# Altium PCB pfe-final.PcbDoc
Units mil, origin at the board's own origin, x right, y up, seen from the top; angles counter-clockwise.
Board outline 6945 x 3630 mil, 2 copper layers (Top Layer, Bottom Layer), stack 61.855 mil thick; 24 components, 17 nets, 158 pads, 15 vias.
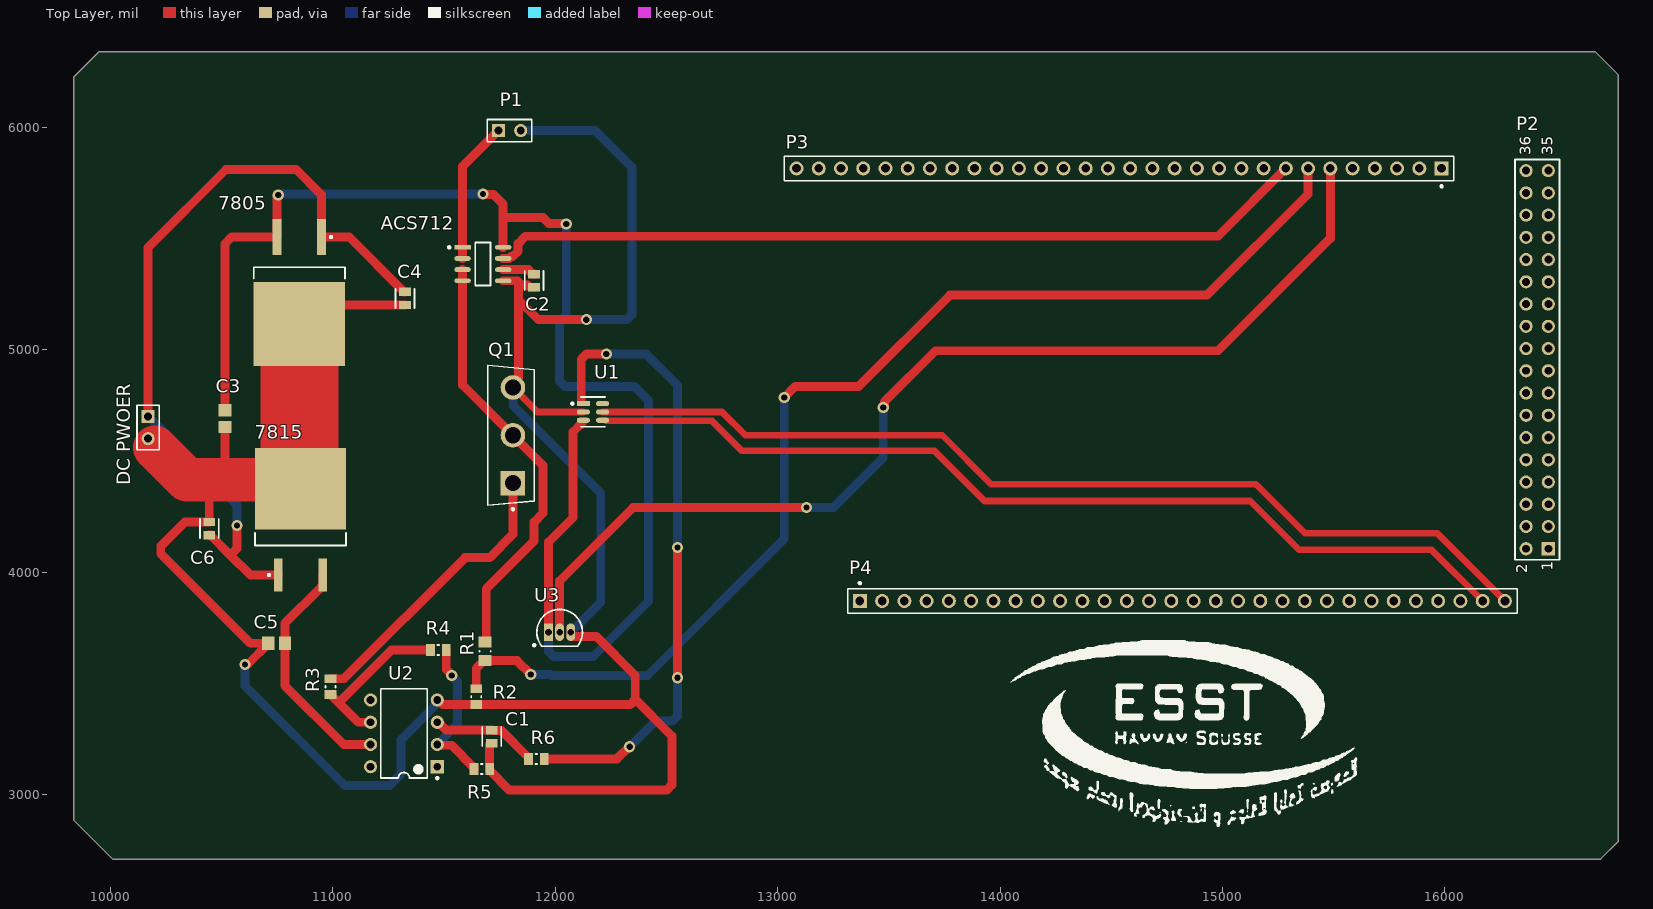
[diagram p0: Top Layer view]
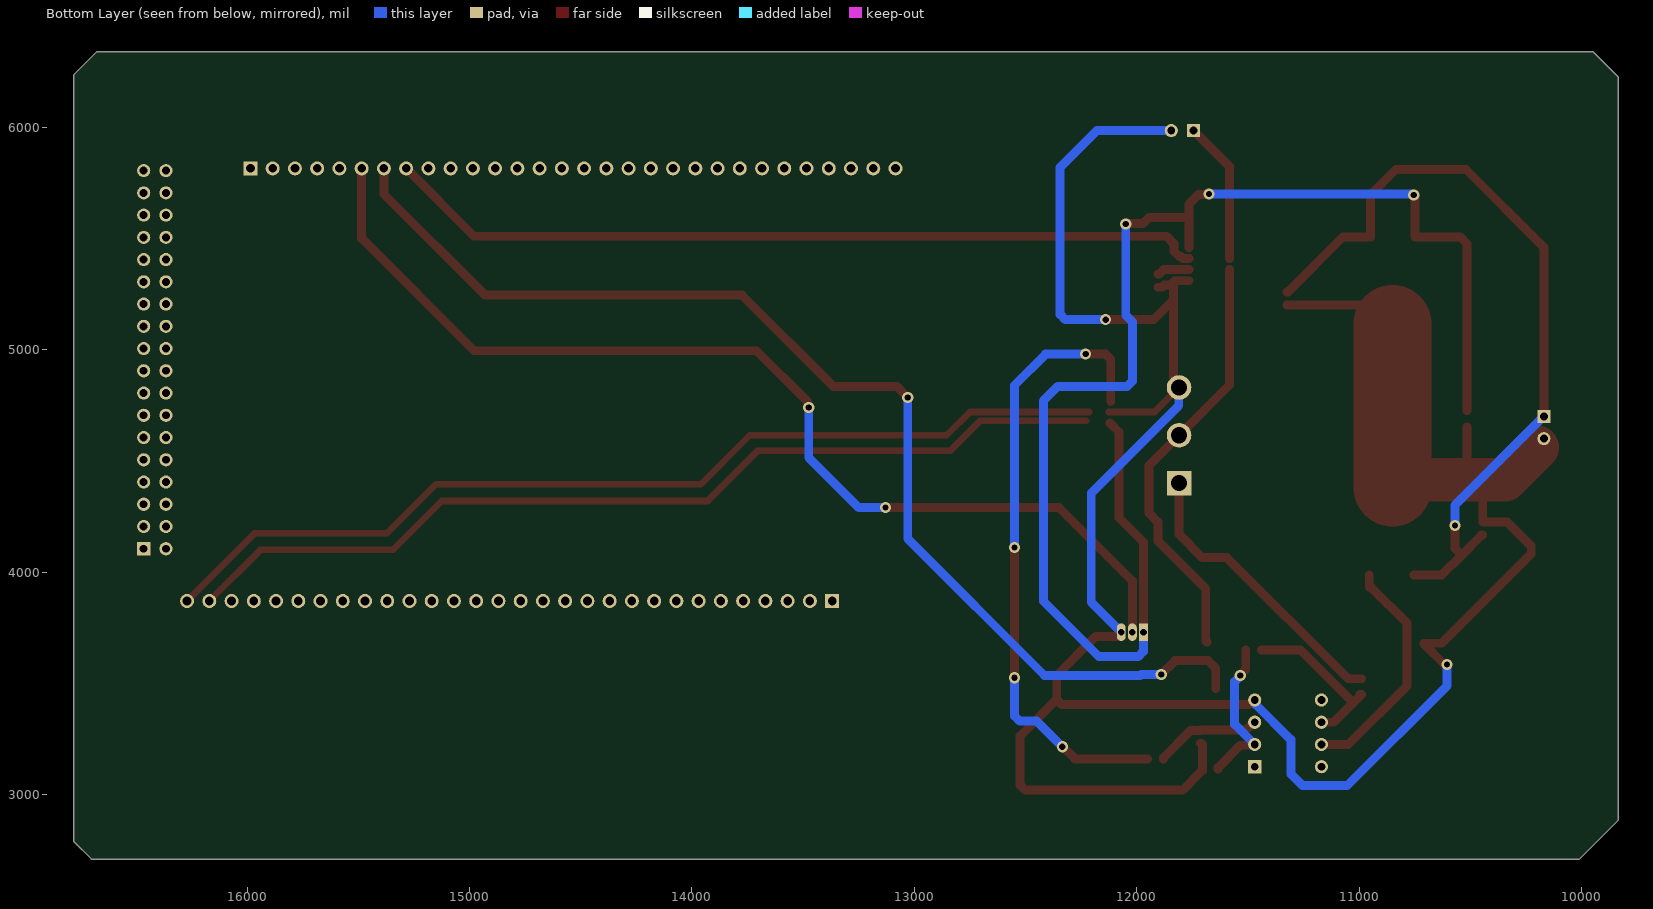
[diagram p1: Bottom Layer view, seen from below]
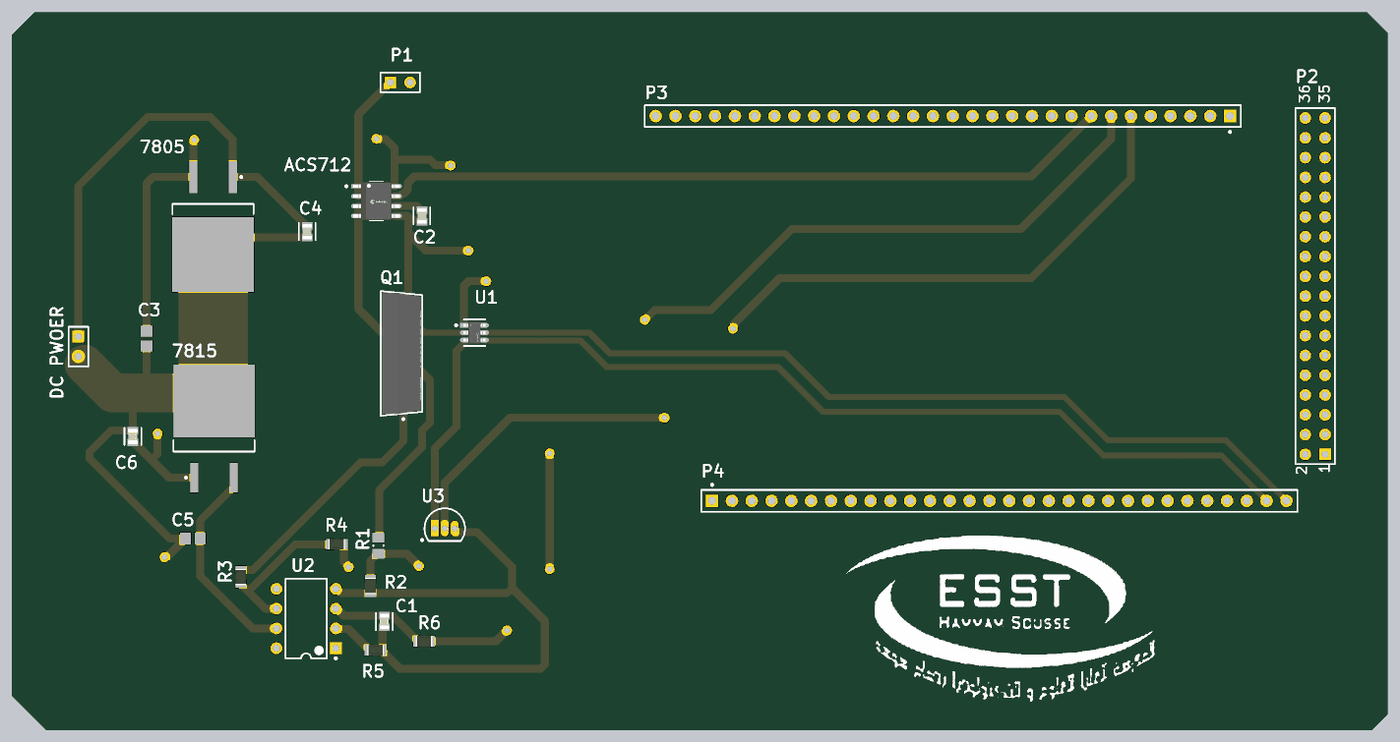
[diagram p2: 3D render of the assembled board from above, using the file's embedded part models]

## Layer stack, top to bottom
Top Solder: solder mask 0.4, Solder Resist, Dk 3.5
Top Layer: signal copper 1.4
Dielectric 1: dielectric 59.0551, FR-4, Dk 4.4
Bottom Layer: signal copper 1.4
Bottom Solder: solder mask 0.4, Solder Resist, Dk 3.5

## Board outline
9835,2885 10010,2710 16700,2710 16780,2790 16780,6235 16675,6340 9950,6340 9835,6225

## Design rules (kind name [scope] priority, off if disabled: settings)
Clearance [All] p1: gap=10 ignorepadtopadclearanceinfootprint=FALSE
MinimumSolderMaskSliver [All] p1: minsoldermaskwidth=1
PolygonConnect [All] p1: connectstyle=Relief reliefconductorwidth=10 reliefentries=4 polygonreliefangle="90 Angle" airgapwidth=10
RoutingVias [All] p1: holewidth=28 width=50 viastyle="Through Hole" minholewidth=28 minwidth=50 maxholewidth=28 maxwidth=50
SilkToSolderMaskClearance [Istext] p1: minsilkscreentomaskgap=10 clearancetoexposedcopper=TRUE
SolderMaskExpansion [All] p1: expansion=4 istentingtop=FALSE
Width [All] p1: maxlimit=1000 minlimit=10 preferedwidth=10
28 further rules are at their usual default settings.

## Components (designator, comment, footprint, x,y, rotation, side; value= is the part's Value field where it differs from the comment)
7805 "L7805CD2T-TR" TO-263_M 10850,5256.73 r270 top
7815 "L7815CD2T-TR" TO-263_N 10855,4235.24 r90 top
ACS712 "ACS712ELCTR-30A-T" FP-LC-8-IPC_C 11675,5385 r0 top
C1 "C0805C106K8PACTU" FP-C0805C-DG-MFG 11715,3260 r270 top value=10uF
C2 "C0805C102J1GACTU" FP-C0805C-DN-MFG 11905,5310 r270 top value=1nF
C3 "GRM21BR71H104KA01L" CAPC2013X135X45ML10T25 10515,4690 r90 top
C4 "C0805C334K5RACTU" FP-C0805C-DN-MFG 11325,5230.47 r270 top value="0.33 μF"
C5 "GRM21BR71H104KA01L" CAPC2013X135X45ML10T25 10747.6,3680 r0 top
C6 "C0805C334K5RACTU" FP-C0805C-DN-MFG 10445,4195.47 r90 top value="0.33 μF"
"DC PWOER" "Header 2" HDR1X2 10170,4700 r270 top
P1 "Header 2" HDR1X2 11745,5985 r0 top
P2 "Header 18X2" HDR2X18 16465,4105 r90 top
P3 "Header 30" HDR1X30 15985,5815 r180 top
P4 "Header 30" HDR1X30 13370,3870 r0 top
Q1 "IRFP260NPBF" FP-PG-TO247-3-MFG 11801.04,4615 r180 top
R1 "150K 1% 0805(2012)" RESC0805(2012)_M 11685,3643.66 r90 top value=90k
R2 "RC0805FR-0710KL" RESC2013X60X35NL10T20 11645,3440 r90 top value=10k
R3 "RC0805FR-0710KL" RESC2013X60X35NL10T20 10990,3485 r90 top value=470
R4 "RC0805FR-0710KL" RESC2013X60X35NL10T20 11475,3650 r180 top value=20k
R5 "RC0805FR-0710KL" RESC2013X60X35NL10T20 11670,3115 r180 top value=10K
R6 "RC0805FR-0710KL" RESC2013X60X35NL10T20 11915.43,3160 r180 top value=10K
U1 "MCP4725A0T-E/CH" FP-C04-028-CHY-IPC_B 12170,4720 r0 top
U2 "TL081CP" P0008A 11320,3275 r180 top
U3 "LM35CZ" Z03A 12020,3730 r270 top

## Footprints (in the part's own frame and the unit in brackets; to place one, negate y for a bottom-side part, rotate by r counter-clockwise, add the part's x,y. Pads: shape width x height; smd on the part's side, far side on the other; paste and mask are expansions set on the pad)
CAPC2013X135X45ML10T25 [mm] "Chip Capacitor, 2-Leads, Body 2.10x1.35mm, IPC Low Density"
  rect 1.4x1.5 smd: 1(-0.95,0) 2(0.95,0)
  body extent -1.05,-0.67 1.05,0.67, height 1.35
FP-C04-028-CHY-IPC_B [mm]
  rect 1.505x0.578 smd paste+0 mask+0: 1(-1.1,0.95)
  rrect100% 1.505x0.578 smd paste+0 mask+0: 2(-1.1,0) 3(-1.1,-0.95) 4(1.1,-0.95) 5(1.1,0) 6(1.1,0.95)
  silkscreen extent -2.48,-1.7 1.4,1.7, body extent -2.1,-1.7 2.1,1.7, height 0.25
FP-C0805C-DG-MFG [mm]
  rect 0.95x1.35 smd paste+0 mask+0: 1(-0.75,0) 2(0.75,0)
  silkscreen extent -1.11,-1.08 1.1,1.07, body extent -1.4,-0.85 1.4,0.85, height 0.25
FP-C0805C-DN-MFG [mm]
  rect 0.95x1.35 smd paste+0 mask+0: 1(-0.75,0) 2(0.75,0)
  silkscreen extent -1.1,-1.07 1.1,1.07, body extent -1.4,-0.85 1.4,0.85, height 0.25
FP-LC-8-IPC_C [mil]
  rect 73.78x21.34 smd paste+0 mask+0: 1(-91.18,75)
  rrect100% 73.78x21.34 smd paste+0 mask+0: 2(-91.18,25) 3(-91.18,-25) 4(-91.18,-75) 5(91.18,-75) 6(91.18,-25) 7(91.18,25) 8(91.18,75)
  silkscreen extent -156,-96 35,96, body extent -132,-100 132,100, height 10
FP-PG-TO247-3-MFG [mm]
  rect 2.8x2.8 hole 1.85 paste-2539.97 mask+0: 1(-0.228,5.46)
  round 2.8 hole 1.85 paste-2539.97 mask+0: 2(-0.228,0) 3(-0.228,-5.46)
  silkscreen extent -2.66,-8 2.66,8.56, body extent -2.76,-8.16 2.76,8.16, height 0.25
HDR1X2 [mm] "Connector; Header; 2 Position"
  rect 1.5x1.5 hole 0.9: 1(0,0)
  round 1.5 hole 0.9: 2(2.54,0)
  silkscreen extent -1.27,-1.27 3.81,1.27
HDR1X30 [mm] "Connector; Header; 30 Position"
  rect 1.6x1.6 hole 0.99: 1(0,0)
  round 1.6 hole 0.99: 2(2.54,0) 3(5.08,0) 4(7.62,0) 5(10.16,0) 6(12.7,0) 7(15.24,0) 8(17.78,0) 9(20.32,0) 10(22.86,0) 11(25.4,0) 12(27.94,0) 13(30.48,0) 14(33.02,0) 15(35.56,0) 16(38.1,0) 17(40.64,0) 18(43.18,0) 19(45.72,0) 20(48.26,0) 21(50.8,0) 22(53.34,0) 23(55.88,0) 24(58.42,0) 25(60.96,0) 26(63.5,0) 27(66.04,0) 28(68.58,0) 29(71.12,0) 30(73.66,0)
  silkscreen extent -1.4,-1.4 75.06,2.17
HDR2X18 [mm] "Connector; Header; 18x2 Position"
  rect 1.5x1.5 hole 0.9: 1(0,0)
  round 1.5 hole 0.9: 2(0,2.54) 3(2.54,0) 4(2.54,2.54) 5(5.08,0) 6(5.08,2.54) 7(7.62,0) 8(7.62,2.54) 9(10.16,0) 10(10.16,2.54) 11(12.7,0) 12(12.7,2.54) 13(15.24,0) 14(15.24,2.54) 15(17.78,0) 16(17.78,2.54) 17(20.32,0) 18(20.32,2.54) 19(22.86,0) 20(22.86,2.54) 21(25.4,0) 22(25.4,2.54) 23(27.94,0) 24(27.94,2.54) 25(30.48,0) 26(30.48,2.54) 27(33.02,0) 28(33.02,2.54) 29(35.56,0) 30(35.56,2.54) 31(38.1,0) 32(38.1,2.54) 33(40.64,0) 34(40.64,2.54) 35(43.18,0) 36(43.18,2.54)
  silkscreen extent -1.27,-1.27 44.45,3.81
P0008A [mm] "DIP, 8-Leads, Body 10.15x6.6mm, Pitch 2.54mm"
  rect 1.5x1.5 hole 0.9: 1(-3.81,3.81)
  round 1.5 hole 0.9: 2(-3.81,1.27) 3(-3.81,-1.27) 4(-3.81,-3.81) 5(3.81,-3.81) 6(3.81,-1.27) 7(3.81,1.27) 8(3.81,3.81)
  silkscreen extent -3.94,-5.1 2.65,5.23, body extent -3.95,-5.07 3.95,5.07, height 5.08
RESC0805(2012)_M [mm] "Chip Resistor, Body 2.0x1.3mm, IPC Low Density"
  rect 1.25x1.5 smd: 1(-1.05,0) 2(1.05,0)
  silkscreen extent -0.05,-0.65 0.05,0.65, body extent -1.1,-0.67 1.1,0.67, height 0.7
RESC2013X60X35NL10T20 [mm] "Chip Resistor, 2-Leads, Body 2.1x1.35mm, IPC Medium Density"
  rect 1x1.35 smd: 1(-0.9,0) 2(0.9,0)
  silkscreen extent -0.1,-0.58 0.1,0.58, body extent -1.05,-0.68 1.05,0.67, height 0.6
TO-263_M [mm] "D2-PAK, 4-Leads, Body 9.2x10.2mm, Pitch 2.54mm, Lead Span 15.4mm, IPC Low Density"
  rect 4.1x1.05 smd: 1(-6.35,2.54) 3(-6.35,-2.54)
  rect 9.6x10.45 smd: 4(3.6,0)
  silkscreen extent -6.47,-5.2 -1.6,5.2, body extent -2.9,-5.2 6.45,5.2, height 4.6
TO-263_N [mm] "D2-PAK, 4-Leads, Body 9.2x10.2mm, Pitch 2.54mm, Lead Span 15.4mm, IPC Medium Density"
  rect 3.8x1 smd: 1(-6.3,2.54) 3(-6.3,-2.54)
  rect 9.3x10.4 smd: 4(3.55,0)
  silkscreen extent -6.42,-5.2 -1.5,5.2, body extent -2.95,-5.2 6.4,5.2, height 4.6
Z03A [mm] "TO, Flat Index; 3 In-Line, Axial Leads; Body Dia. 5mm; Leads 0.55 x 0.50 mm (max)"
  rect 2x1 hole 0.75: 1(0,-1.27)
  oval 2x1 hole 0.75: 2(0,0) 3(0,1.27)
  silkscreen extent -2.6,-3.02 1.6,2.6, body extent -2.6,-2.61 1.6,2.61, height 5.2

## Part data
7805: library part CMP-0244-00213-1, "Positive Voltage Regulator, 3-Pin D2PAK, Tape and Reel", ComponentLink1Description="Manufacturer URL", ComponentLink1URL=http://www.st.com, ComponentLink2Description=Datasheet, ComponentLink2URL=http://www.st.com/internet/com/TECHNICAL_RESOURCES/TECHNICAL_LITERATURE/DATASHEET/CD00000444.pdf, DatasheetVersion=16/11/2011, PackageDescription="3-Pin Transistor Outline Package 2.54 mm Pitch, 15.4 mm Lead Span (D2PAK)", PackageReference=TO-263, PackageVersion=2011
7815: library part CMP-0244-00179-1, "Positive Voltage Regulator, 3-Pin D2PAK, Tape and Reel", ComponentLink1Description="Manufacturer URL", ComponentLink1URL=http://www.st.com, ComponentLink2Description=Datasheet, ComponentLink2URL=http://www.st.com/internet/com/TECHNICAL_RESOURCES/TECHNICAL_LITERATURE/DATASHEET/CD00000444.pdf, DatasheetVersion=16/11/2011, PackageDescription="3-Pin Transistor Outline Package 2.54 mm Pitch, 15.4 mm Lead Span (D2PAK)", PackageReference=TO-263, PackageVersion=2011
ACS712: library part CMP-2000-04990-2, "SENSOR CURRENT HALL 30A AC/DC", Case/Package=SOIC, Current Sensing=30A, Frequency=80kHz, Max Operating Temperature=85°C, Max Supply Current=13mA, Max Supply Voltage=5.5V, Min Operating Temperature=-40°C, Min Supply Voltage=4.5V, Operating Supply Voltage=5V, Output Current=10mA, Package Quantity=1, Accuracy=1.5%, Bandwidth=80kHz, Lead Free="Lead Free", Linearity=1.5%, Mount="Surface Mount", Number of Channels=1, Number of Pins=8, Packaging="Cut Tape", Polarity=Bidirectional, Quiescent Current=10mA, REACH SVHC="No SVHC", Response Time=5us, RoHS Compliant=Yes, Sensitivity=66mV/A, Series=-, Termination=SMD/SMT
C1: library part CMP-2007-03243-2, "CAP CER 10UF 10V X5R 0805", 3DS Part Number=220-00001, Capacitance=10uF, Manufacturer=Kemet, Package=C0805C-DG, Temperature="-55°C to +85°C", Temperature Characteristic=X5R, Temperature Coefficient=15%, Temperature Range High=+85°C, Temperature Range Low=-55°C, Tolerance=10%, Voltage=10V, Automotive=No, Category=Cap, ComponentLink2Description=Datasheet, ComponentLink2URL=https://content.kemet.com/datasheets/KEM_C1006_X5R_SMD.pdf, Device Class L1="Passive Components", Device Class L2=Capacitors, Device Class L3="Ceramic Capacitors", Digikey Description="CAP CER 10UF 10V X5R 0805", Height=1.4mm, Ipc Land Pattern Name=CAPC200125X125, Lead Free=Yes, Manufacturer Part Number=C0805C106K8PACTU, Material=Ceramic, Mouser Description="CAP CER 10UF 10V X5R 0805", Octopart=https://octopart.com/c0805c106k8pactu-kemet-98697, RoHS=TRUE, Voltage Rating=10V
C2: library part CMP-2007-00233-2, "CAP CER 1000PF 100V C0G/NP0 0805", Capacitance="1,000 pF", Manufacturer=KEMET, Package=C0805C-DN, Temperature="-55°C to +125°C", Temperature Characteristic=C0G, Temperature Coefficient=30ppm/°C, Temperature Range High=+125°C, Temperature Range Low=-55°C, Tolerance=0.05, Voltage Rating="100 V", Automotive=No, Category=Cap, ComponentLink2Description=Datasheet, ComponentLink2URL=https://content.kemet.com/datasheets/KEM_C1003_C0G_SMD.pdf, Device Class L1="Passive Components", Device Class L2=Capacitors, Device Class L3="Ceramic Capacitors", Digikey Description="CAP CER 1000PF 100V C0G/NP0 0805", Height=0.88mm, Ipc Land Pattern Name=CAPC200125X78, Lead Free=Yes, Manufacturer Part Number=C0805C102J1GACTU, Material=Ceramic, Mouser Description="Multilayer Ceramic Capacitors MLCC - SMD/SMT 100volts 1000pF C0G 5%", Octopart=https://octopart.com/c0805c102j1gactu-kemet-105157, RoHS=TRUE
C3 C5: library part CMP-2100-03644-1, "Chip Capacitor, 0.1 uF, +/- 10%, 50 V, -55 to 125 degC, 0805 (2012 Metric), RoHS, Tape and Reel", Capacitance=0.1uF, Case Code (Imperial)=0805, Case Code (Metric)=2012, Dielectric=X7R, Dielectric Material=Ceramic, Insulation Resistance=10GR, Manufacturer=Murata, Max Operating Temperature=125degC, Min Operating Temperature=-55degC, Package Description="2-Pin Surface Mount Device, Body 2 x 1.25 mm", Package Quantity=1, Tolerance=10%, Voltage=50V, Case/Package=0805, Datasheet URL=http://psearch.en.murata.com/capacitor/product/GRM21BR71H104KA01%23.pdf, Datasheet Version=42675.0, Depth=1.25mm, Height=1.25mm, Lead Free=LeadFree, Length=2mm, Manufacturer URL=http://www.murata.com/, Material=Ceramic, Mount=SurfaceMount, Number of Pins=2, Package Reference=0805, Packaging=TapeandReel, Radiation Hardening=No, REACH SVHC=Unknown, RoHSCompliant=true, Termination=SMD/SMT, Thickness=0.053inch, Voltage Rating=50V, Voltage Rating (DC)=50V, Width=0.049inch
C4 C6: library part CMP-1036-04607-3, "CAP CER 0.33UF 50V X7R 0805", Capacitance="0.33 μF", Manufacturer=KEMET, Package=C0805C-DN, Temperature="-55°C to +125°C", Temperature Characteristic=X7R, Temperature Coefficient=30ppm/°C, Temperature Range High=+125°C, Temperature Range Low=-55°C, Tolerance=0.1, Voltage Rating="50 V", Automotive=No, Category=Cap, ComponentLink2Description=Datasheet, ComponentLink2URL=https://content.kemet.com/datasheets/KEM_C1003_C0G_SMD.pdf, Device Class L1="Passive Components", Device Class L2=Capacitors, Device Class L3="Ceramic Capacitors", Digikey Description="CAP CER 0.33UF 50V X7R 0805", Height=0.88mm, Ipc Land Pattern Name=CAPC200125X78, Lead Free=Yes, Manufacturer Part Number=C0805C334K5RACTU, Material=Ceramic, Mouser Description="Multilayer Ceramic Capacitors MLCC - SMD/SMT 50volts 0.33uF 10% X7R", Octopart=https://octopart.com/c0805c334k5ractu-kemet-10475704, RoHS=TRUE
"DC PWOER" P1: "Header, 2-Pin", LatestRevisionDate=17-Jul-2002, LatestRevisionNote="Re-released for DXP Platform.", Publisher="Altium Limited"
P2: "Header, 18-Pin, Dual row", LatestRevisionDate=17-Jul-2002, LatestRevisionNote="Re-released for DXP Platform.", Publisher="Altium Limited"
P3 P4: "Header, 30-Pin", LatestRevisionDate=17-Jul-2002, LatestRevisionNote="Re-released for DXP Platform.", Publisher="Altium Limited"
Q1: library part CMP-32901-000262-1, "MOSFET N-CH 200V 50A TO247AC", Case/Package=TO-247, Continuous Drain Current (ID)=50A, Drain to Source Breakdown Voltage=200V, Drain to Source Resistance=40mR, Gate to Source Voltage (Vgs)=20V, Input Capacitance=4.057nF, Max Operating Temperature=175°C, Max Power Dissipation=300W, Min Operating Temperature=-55°C, Threshold Voltage=4V, Drain to Source Voltage (Vdss)=200V, Element Configuration=Single, Halogen Free="Not Halogen Free", Height=0.799inch, Lead Free="Lead Free", Length=0.625inch, Max Dual Supply Voltage=200V, Mount="Through Hole", Number of Pins=3, Packaging=Bulk, Power Dissipation=300W, Rds On Max=40mR, REACH SVHC="No SVHC", RoHS Compliant=Yes, Turn-Off Delay Time=55ns, Turn-On Delay Time=17ns, Width=0.209inch
R1: library part CMP-1013-00754-1, "150K 0.125W 1% 0805 (2012 Metric)  SMD", Case-EIA=0805, Case-Metric=2012, Power="0.125 W", Tolerance="1 %", Technology=SMT
R2 R3 R4 R5 R6: library part CMP-1659-00013-4, "Chip Resistor, 10 KOhm, +/- 1%, 0.125 W, -55 to 155 degC, 0805 (2012 Metric), RoHS, Tape and Reel", Manufacturer=Yageo, Max Operating Temperature="155 degC", Min Operating Temperature="-55 degC", Package Quantity=5000, Voltage Rating="150 V", ComponentLink1Description="Manufacturer URL", ComponentLink1URL=http://www.yageo.com/, ComponentLink2Description=Datasheet, ComponentLink2URL=http://www.yageo.com/documents/recent/PYu-RC_Group_51_RoHS_L_04.pdf, DatasheetVersion="Rev. 4, 02/2016", Height="0.5 mm", Length="2 mm", Mount="Surface Mount", Mounting Technology="Surface Mount", PackageDescription="2-Pin Surface Mounted Device, Body 2 x 1.25 mm", PackageReference=0805, Packaging="Tape and Reel", Pins=2, REACH SVHC="No SVHC", RoHSCompliant=true
U1: library part CMP-0188-00760-3, "IC DAC 12BIT V-OUT SOT23-6", Case/Package=SOT-23-6, Input Offset Voltage (Vos)=1.1mV, Max Operating Temperature=125°C, Max Supply Voltage=5.5V, Min Operating Temperature=-40°C, Min Supply Voltage=2.7V, Nominal Supply Current=210uA, Package Quantity=3000, Contact Plating=Tin, Height=1.3mm, Integral Nonlinearity (INL)=14.5LSB, Interface=I2C, Lead Free="Lead Free", Length=3.1mm, Mount="Surface Mount", Number of Bits=12, Number of Channels=1, Number of Converters=1, Number of D/A Converters=1, Number of DAC Channels=1, Number of Outputs=1, Number of Pins=6, Output Type=Voltage, Packaging="Tape and Reel", Polarity=Unipolar, Radiation Hardening=No, REACH SVHC="No SVHC", Resolution=12b, Settling Time=6us, Supply Type=Single, Termination=SMD/SMT, Width=1.8mm
U2: library part CMP-0017-00937-2, "JFET-Input Operational Amplifier, 7 to 36 V, 0 to 70 degC, 8-pin DIP (P8), Pb-Free (RoHS)", Manufacturer="Texas Instruments", Rating=Military, Total Supply Voltage(Max)(+5V is 5, +/-5V is 10)=36, Total Supply Voltage(Min)(+5V is 5, +/-5V is 10)=7, CMRR(Min)(dB)=70, Code_JEDEC=MS-001, ComponentLink1Description="Manufacturer URL", ComponentLink1URL=http://www.ti.com/, ComponentLink2Description=Datasheet, ComponentLink2URL=http://www.ti.com/lit/ds/symlink/tl081.pdf, ComponentLink3Description="Package Specification", ComponentLink3URL=http://www.ti.com/litv/pdf/mpdi001b, DatasheetVersion=SLOS081G, Eco-Plan="Pb-Free (RoHS)", GBW(Typ)(MHz)=3, IIB(Max)(pA)=400, Iq per channel(Max)(mA)=2.8, Mounting Technology="Through Hole", Number of Channels=1, Offset Drift(Typ)(uV/C)=18, PackageDescription="8-Pin Plastic In-Line, Body 9.59 x 6.35 mm, Pitch 2.54 mm", PackageReference=P0008A, PackageVersion="4040082/E, 04/2010", PartNumber=TL081CP, Slew Rate(Typ)(V/us)=13, Sub Family="General Purpose Amplifier, High Supply Voltage Amplifier (>=30V)", Vio (25C)(Max)(mV)=15, Vn at 1kHz(Typ)(nV/rtHz)=18
U3: library part CMP-0066-00027-2, "Precision Centigrade Temperature Sensor, 3-pin TO-92", Manufacturer="National Semiconductor", PackageTopMarking=NSXYTT*LM35*CZ, PowerWise=N, Code_JEDEC=TO-226-AA, ComponentLink1Description="LM35 Datasheet", ComponentLink1URL=http://www.national.com/ds/LM/LM35.pdf, ComponentLink2Description="LM35 Web Page", ComponentLink2URL=http://www.national.com/pf/LM/LM35.html, ComponentLink3Description="Z03A Package Page", ComponentLink3URL=http://www.national.com/packaging/folders/z03a.html, CompType="Temp Sensor IC", DatasheetVersion=Nov-2000, PackageDescription="TO-92, Molded, 3 Lead", PackageReference=Z03A, PackageVersion="revG, Sep-2000", PinCount=3, RevisionNote="Component URLs added", RoHS=N

## Via types
v1: diameter 50, hole 28, Top Layer to Bottom Layer, 15 vias

## Nets (pads, with @x,y where several pads share a name; then routed paths per layer and width w, separated by ;. In a path a pad name is that pad's centre, name@x,y a point inside that pad or via, vN(x,y) a via of type N, cw(c..) or ccw(c..) an arc to the next point about the centre after c; other vN are vias at no path point)
+5: 7805.3 ACS712.8 C3.2 U1.3 U3.1 | length 6415.9
  Top Layer w40: C3.2 10515,5475 10546.73,5506.73 7805.3 10750,5687.29 10755,5692.29 v1(10755,5695) ; v1(11675,5700) 11676.91,5698.09 11721.91,5698.09 11766.18,5653.82 11766.18,5595 ; ACS712.8 11766.18,5595 ; U3.1 11970,4135 12080,4245 12080,4630 12120,4670 ; v1(12050,5565) 12048.09,5566.91 11973.09,5566.91 11945,5595 11766.18,5595
  Bottom Layer w40: v1(10755,5695) 10757.71,5695 10762.71,5700 v1(11675,5700) ; U3.1 11970.31,3729.69 11970.31,3643.43 11993.75,3620 12170,3620 12420,3870 12420,3930.49 12420,4770 12355,4835 12043.43,4835 12020,4858.43 12020,5125 12050,5155 v1(12050,5565)
+15: 7815.3 C5.2 U2.7 | length 1066.4
  Top Layer w40: 7815.3 10955,3932.72 10954.69,3932.4 10947.87,3932.4 10785,3769.53 C5.2 10785,3490 11050,3225 U2.7
+20: 7805.1 7815.1 "DC PWOER.1" C4.1 C6.1 | length 3583.8
  Top Layer w40: 10170,4700 10170,5460 10520,5810 10835,5810 10950,5695 7805.1 11072.99,5506.73 11319.72,5260 C4.1 ; C6.1 10450.28,4165.94 10539.65,4076.57 ; v1(10570,4210) 10570,4106.93 10539.65,4076.57 ; 7815.1 10629.02,3987.2 10539.65,4076.57
  Bottom Layer w40: 10170,4700 10570,4300 v1(10570,4210)
+PV: ACS712.1 ACS712.2 P1.1 | length 641.8
  Top Layer w40: ACS712.2 ACS712.1 11583.82,5823.82 P1.1
DAC_OUT: R6.1 U1.1 | length 2854.3
  Top Layer w40: R6.1 12277.29,3160 12332.29,3215 v1(12335,3215) ; U1.1@12117.04,4766.02 12117.04,4956.57 12140.47,4980 v1(12230,4980) ; v1(12550,3525) v1@12550,4107.29
  Bottom Layer w40: v1(12230,4980) 12410,4980 12550,4840 v1(12550,4110) ; v1(12335,3215) 12450,3330 12526.57,3330 12550,3353.43 v1(12550,3525)
GND: 7805.4 7815.4 "DC PWOER.2" ACS712.5 C1.2 C2.2 C3.1 C4.2 C5.1 C6.2 P1.2 Q1.3 R2.1 R5.1 U1.2 U2.4 U3.3 | length 11879.4
  Top Layer w30: Q1.3 11919.96,4720 U1.2
  Top Layer w40: C3.1 10515,4420.43 10510,4415.43 10445,4350.43 C6.2 10335,4225 10226.57,4116.57 10226.57,4083.43 10630,3680 C5.1 10710.2,3678.03 10619.08,3586.91 10606.91,3586.91 v1(10605,3585) ; 7805.4 10935.94,5200.94 C4.2 ; U2.4 11475.16,3425 11495.59,3404.57 R2.1 12336.57,3404.57 12360,3428 ; C1.2 11709.72,3230.47 11705.43,3226.18 R5.1 11705.43,3108.74 11794.17,3020 12501.57,3020 12525,3043.43 12525,3263 12360,3428 ; ACS712.5 11830,5310 11849.17,5290.83 ; Q1.3 11810,4848.97 11835,4873.97 11835,5225 ; C2.2 11886.17,5280.47 11875.82,5290.83 11835,5290.83 11835,5225 ; U3.3 12070,3710.94 12070.32,3710.63 12184.37,3710.63 12360,3535 12360,3428 ; v1(12140,5135) 11925,5135 11835,5225
  Top Layer w197: 10200,4560 10344.57,4415.43 10510,4415.43 10814.57,4415.43 10850,4380 7815.4
  Top Layer w350: 7815.4@10850,4380 7805.4
  Bottom Layer w40: v1(10605,3585) 10605,3490 11055,3040 11255,3040 11307.74,3092.74 11307.74,3246.92 11466.35,3405.54 11466.35,3421.35 U2.4 ; Q1.3 11811.42,4828.54 11811.42,4748.58 12205,4355 12205,3865 U3.3 ; P1.2 12180,5985 12345,5820 12345,5158.43 12321.57,5135 v1@12142.71,5135
IPH: ACS712.7 P3.8 | length 3706.3
  Top Layer w40: ACS712.7 11792.4,5410 11801.73,5419.33 11809.25,5419.33 11833.07,5443.15 11833.07,5476.89 11866.18,5510 14980,5510 P3.8
NetACS712_3: ACS712.3 ACS712.4 Q1.2 R1.2 | length 1932.5
  Top Layer w40: ACS712.3 ACS712.4 11583.82,4841.18 Q1.2 11945,4480 11945,4265 11905,4225 11905,4140 11690,3925 11690,3689.61 11685.39,3685 R1.2
NetACS712_6: ACS712.6 C2.1 | length 147.3
  Top Layer w40: ACS712.6 11879.25,5360 11899.72,5339.53 C2.1
NetC1_1: C1.1 R6.2 U2.3 | length 482
  Top Layer w40: U2.3 11475.16,3325 11510.63,3289.53 C1.1 11716.3,3288.23 11758.03,3288.23 11880,3166.26 R6.2
NetR3_1: R3.1 R4.2 U2.6 | length 796.5
  Top Layer w40: U2.6 11114.57,3325 11024.57,3415 ; R4.2 11265,3650 11030,3415 11024.57,3415 ; 11024.57,3415 10996.57,3442.99 10996.57,3449.25 10996.26,3449.57 R3.1 11024.57,3415
NetR4_1: R4.1 R5.2 U2.2 | length 696.6
  Top Layer w40: U2.2 11473.65,3221.35 11534.47,3221.35 11634.57,3121.26 R5.2 ; R4.1 11510.43,3562.27 11535,3537.71 v1(11535,3535)
  Bottom Layer w40: U2.2 11560,3315 11560,3507.29 11535,3532.29 v1(11535,3535)
SCL: P4.30 U1.5 | length 4408.8
  Top Layer w30: U1.5 12750,4720 12855,4615 13740,4615 13960,4395 15150,4395 15370,4175 15965,4175 P4.30
SDA: P4.29 U1.4 | length 4277.6
  Top Layer w30: U1.4@12227.96,4680 12705,4680 12840,4545 13705,4545 13930,4320 15125,4320 15345,4100 15940,4100 P4.29
TEMP: P3.6 U3.2 | length 4791.4
  Top Layer w40: U3.2 12020,3960 12350,4290 v1(13130,4290) ; v1(13475,4740) 13480,4745 13480,4765 13710,4995 14980,4995 15485,5500 P3.6
  Bottom Layer w40: v1(13130,4290) 13250,4290 13475,4515 v1(13475,4740)
VGS: Q1.1 R3.2 | length 1319.1
  Top Layer w40: R3.2 11050.43,3520.43 11595,4065 11705,4065 11810,4170 Q1.1
VPH: P3.7 R1.1 R2.2 | length 5258
  Top Layer w40: R2.2 11645,3567.24 11680.08,3602.32 R1.1 11827.68,3602.32 v1(11890,3540) ; v1(13030,4785) 13080,4835 13365,4835 13775,5245 14930,5245 15385,5700 P3.7
  Bottom Layer w40: v1(11890,3540) 11980,3540 11985,3535 12415,3535 13030,4150 v1(13030,4785)
pads on no net: P2.1 P2.2 P2.3 P2.4 P2.5 P2.6 P2.7 P2.8 P2.9 P2.10 P2.11 P2.12 P2.13 P2.14 P2.15 P2.16 P2.17 P2.18 P2.19 P2.20 P2.21 P2.22 P2.23 P2.24 P2.25 P2.26 P2.27 P2.28 P2.29 P2.30 P2.31 P2.32 P2.33 P2.34 P2.35 P2.36 P3.1 P3.2 P3.3 P3.4 P3.5 P3.9 P3.10 P3.11 P3.12 P3.13 P3.14 P3.15 P3.16 P3.17 P3.18 P3.19 P3.20 P3.21 P3.22 P3.23 P3.24 P3.25 P3.26 P3.27 P3.28 P3.29 P3.30 P4.1 P4.2 P4.3 P4.4 P4.5 P4.6 P4.7 P4.8 P4.9 P4.10 P4.11 P4.12 P4.13 P4.14 P4.15 P4.16 P4.17 P4.18 P4.19 P4.20 P4.21 P4.22 P4.23 P4.24 P4.25 P4.26 P4.27 P4.28 U1.6 U2.1 U2.5 U2.8

## Silkscreen, mask and mechanical layers (free items; w line width, h text height)
Top Overlay:
  drawing of 62 lines, arcs and shapes, not listed
Mechanical 1:
  lines w10: 9880,1345 9885,1345 ; 9835,2885 9835,6225 9950,6340 16675,6340 16780,6235 16780,2790 16700,2710 10010,2710 9835,2885

## Text inside footprints (layer, text, board x,y; h text height)
P2: Top Overlay "2" at 16370,3995 h50 r90; Top Overlay "1" at 16485,4005 h50 r90; Top Overlay "35" at 16485,5875 h50 r90; Top Overlay "36" at 16385,5875 h50 r90